# Altium PCB UTAT_data handling_v1_componentMap.PcbDoc (part 3 of 3)
Units mm, origin at the board's own origin, x right, y up, seen from the top; angles counter-clockwise.
Board outline 152.4 x 101.6 mm, 4 copper layers (Top Layer, +3V3, GND, Bottom Layer); 168 components, 207 nets, 753 pads, 464 vias.
Unrouted connection lines stored in the file: 1.
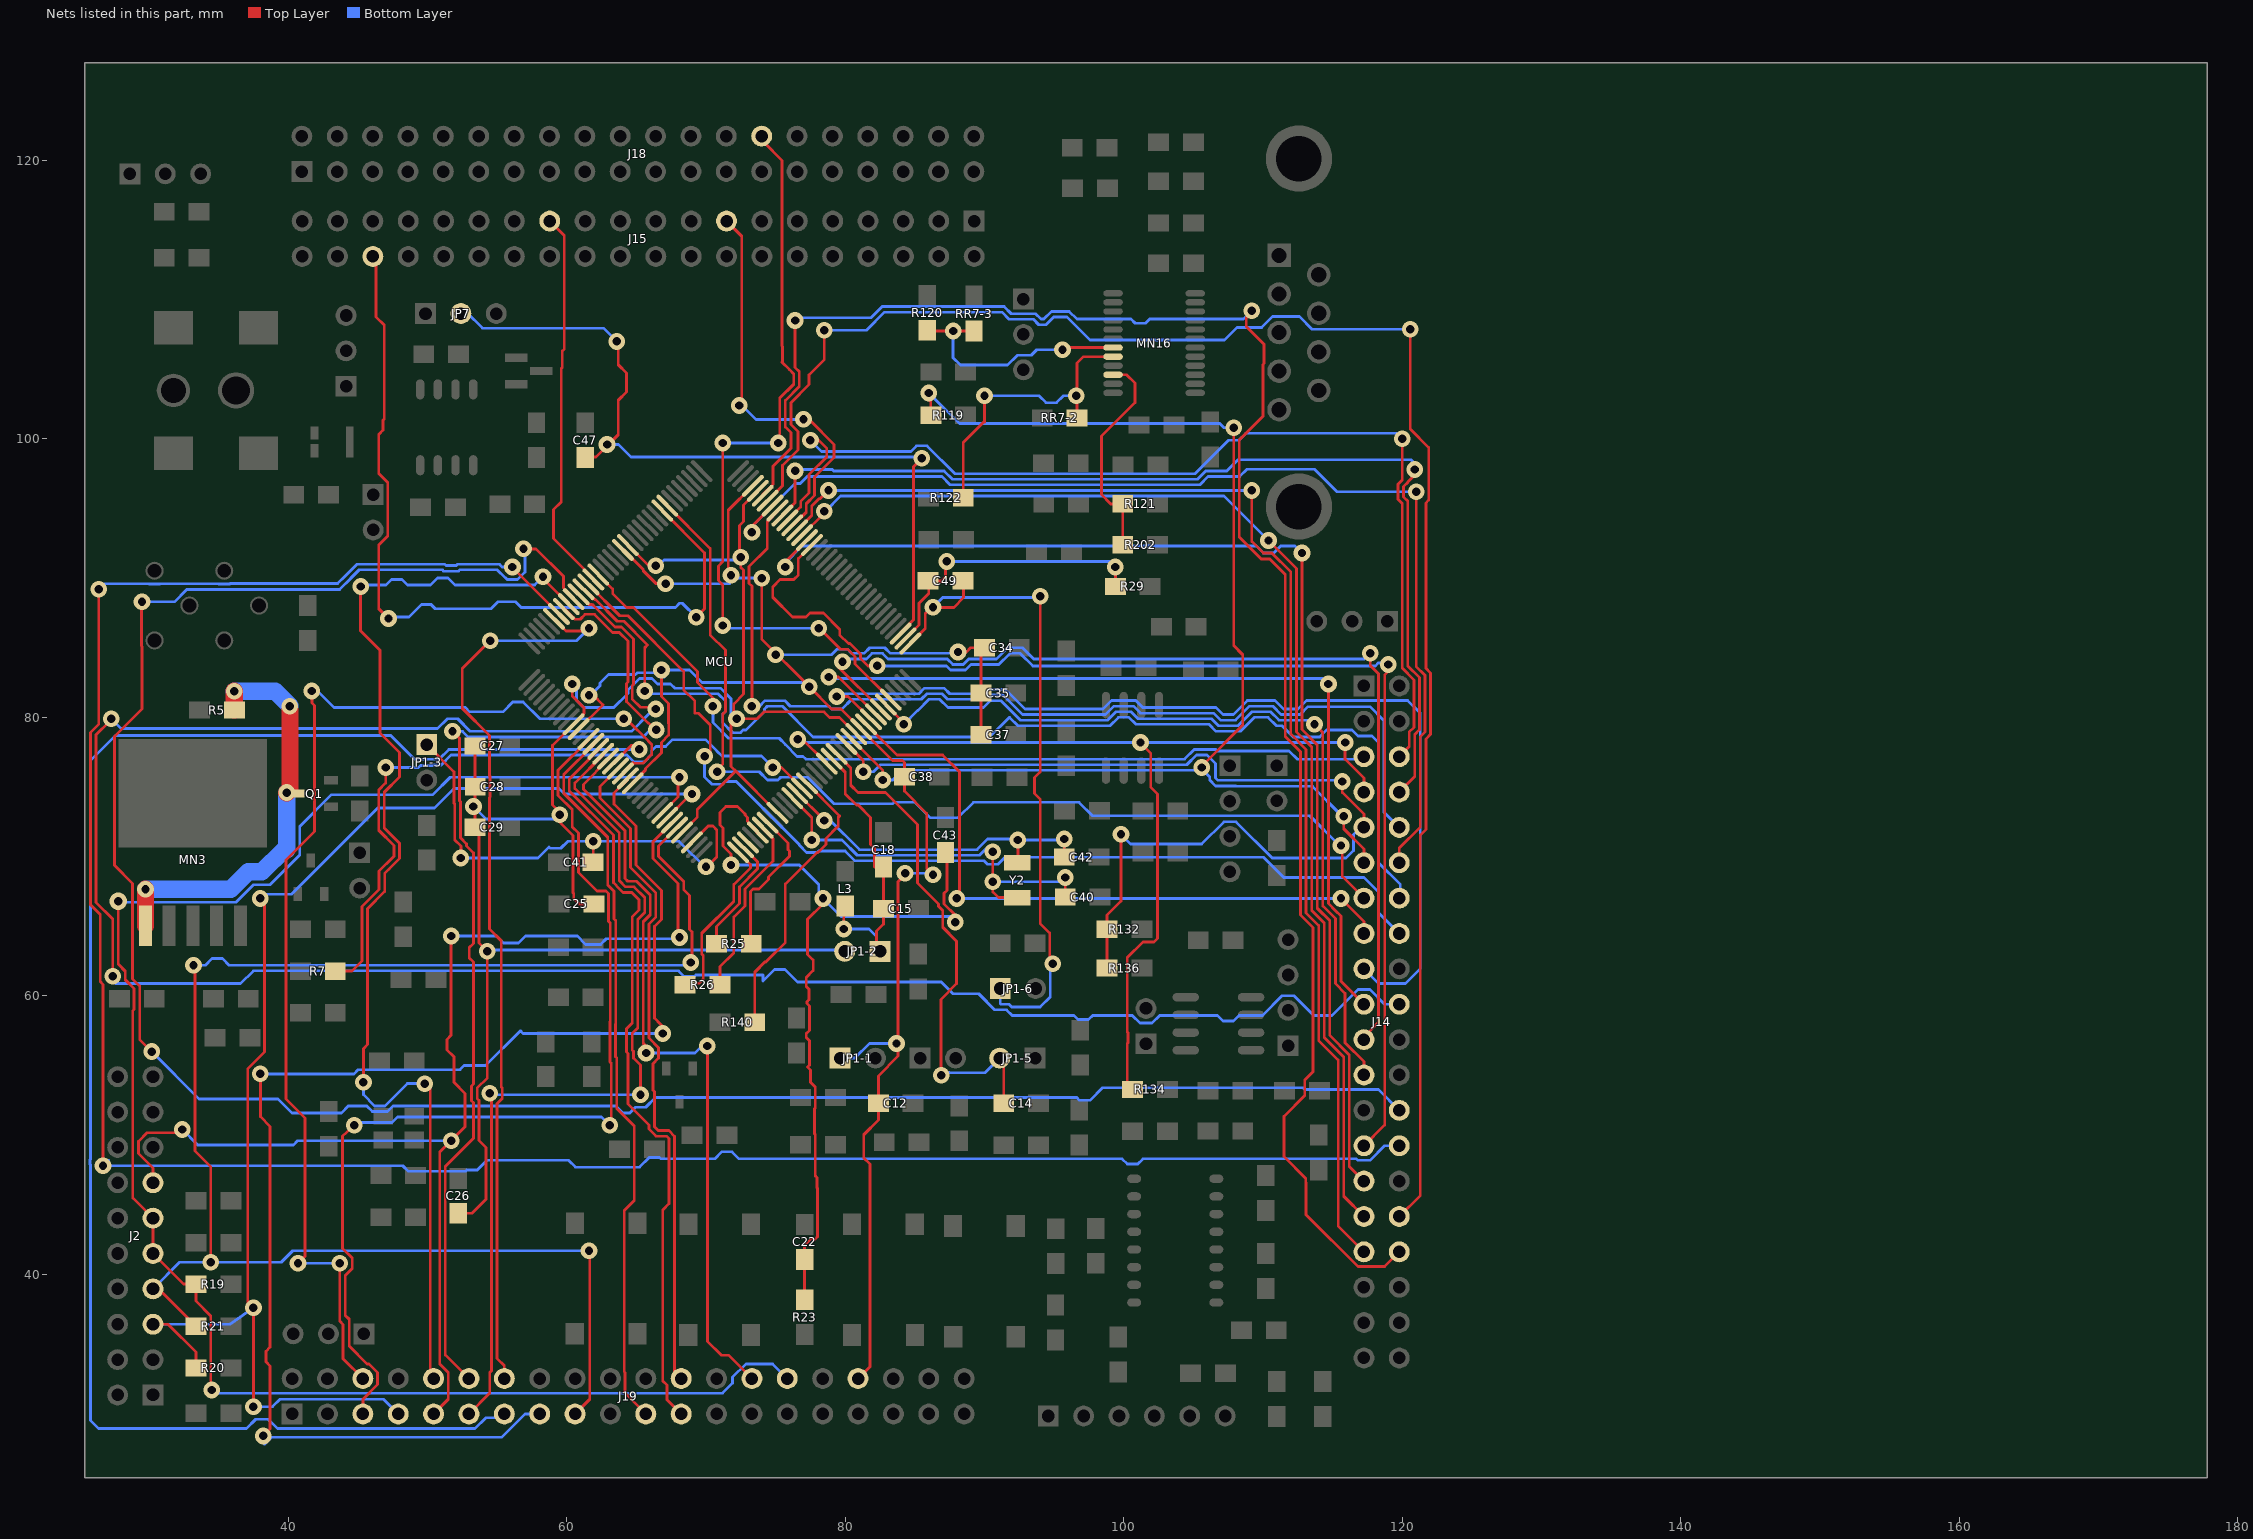
[diagram p5: the nets of this part, all layers, seen from the top]

## Via types
v1: diameter 1.2, hole 0.6, Top Layer to Bottom Layer, 463 vias
v2: diameter 1.27, hole 0.6, Top Layer to Bottom Layer, 1 vias

## Nets (pads, with @x,y where several pads share a name; then routed paths per layer and width w, separated by ;. In a path a pad name is that pad's centre, name@x,y a point inside that pad or via, vN(x,y) a via of type N, cw(c..) or ccw(c..) an arc to the next point about the centre after c; other vN are vias at no path point) (continued)
PB27: J18.28 MCU.68 | length 55.7
  Top Layer w0.2: v1(71.2,86.6) 71.2,89.527 70.9,89.827 70.9,90.873 71.2,91.173 v1(71.2,99.7) ; J18.28@74.151,121.32 75.47,120.001 75.47,106.668 75.5,106.638 75.5,105.562 75.47,105.532 75.47,105.5 75.473,105.5 76,104.973 ; v1(75.2,99.7) 75.3,99.8 75.3,102.927 76.3,103.927 76.3,104.673 76,104.972 ; v1(78.1,86.4) 78.146,86.4 79.646,84.9 80.173,84.9 80.7,84.373 80.7,83.846 MCU.68@83.268,81.278
  Bottom Layer w0.2: v1(71.2,86.6) 71,86.4 v1(78.1,86.4) ; v1(71.2,99.7) 71,99.7 v1(75.2,99.7)
PB28: J2.9 J2.11 J19.30 MCU.28 R19.1 | length 129.3
  Top Layer w0.2: v2(27.8,66.8) 27.8,62.273 28.3,61.773 28.3,61.16 28.931,60.529 28.931,59.031 28.84,58.94 28.84,45.49 J2.11@30.29,44.04 J2.9@30.29,41.5 32.49,39.3 33.361,39.3 R19.1@33.381,39.28 33.381,38.079 34.431,37.029 34.431,31.769 v1(34.5,31.7) ; MCU.28@66.863,73.146 68,74.282 68,75.6 v1(68.1,75.7)
  Bottom Layer w0.2: v2@28.226,66.726 36.253,66.726 37.507,67.98 38.688,67.98 40.825,70.117 40.825,72.175 43.1,74.45 50.385,74.45 51.635,75.7 v1(68.1,75.7) ; v1(34.5,31.7) 34.73,31.47 71.196,31.47 71.915,32.189 71.915,32.619 72.866,33.57 74.791,33.57 J19.30@75.841,32.52
PB29: J2.5 J19.7 MCU.29 R20.1 | length 97.3
  Top Layer w0.2: J2.5@30.29,36.42 31.38,36.42 33.381,34.419 R20.1@33.381,33.28 ; v1@37.1,38 37.1,54.773 38.3,55.973 38.3,66.9 38.2,67 v1(38,67) ; v1(37.5,30.5) v1(37.5,37.6) ; MCU.29@67.217,72.792 68.825,74.4 v1@69.2,74.4
  Bottom Layer w0.2: J2.5@30.29,36.42 35.82,36.42 v1(37.5,37.6) ; v1(37.5,30.5) 38.877,30.5 39.407,31.03 46.851,31.03 J19.7@47.901,29.98 ; v1@38.2,67.3 40.227,67.3 46.427,73.5 50.5,73.5 51.9,74.9 59.438,74.9 59.838,74.5 v1(69,74.5)
PB30: J2.13 J19.9 MCU.30 | length 90.1
  Top Layer w0.2: J2.13@30.29,46.58 30.29,47.635 29.24,48.685 29.24,49.555 29.855,50.17 32.17,50.17 v1(32.4,50.4) ; J19.9@50.441,29.98 51.491,31.03 51.491,32.955 50.884,33.562 50.884,48.784 v1(51.7,49.6) 52.7,50.6 52.7,53 51.9,53.8 51.9,55.627 51.4,56.127 51.4,56.873 51.7,57.173 v1(51.7,64.3) ; MCU.30@67.571,72.439 66.2,71.068 66.2,69.865 68,68.065 68,64.3 v1(68.1,64.2)
  Bottom Layer w0.2: v1(32.4,50.4) 33.5,49.3 40.373,49.3 40.673,49.6 v1(51.7,49.6) ; v1(51.7,64.3) 54.962,64.3 55.462,63.8 56.538,63.8 57.038,64.3 60.762,64.3 61.362,63.7 62.438,63.7 62.838,64.1 68,64.1 v1(68.1,64.2)
PB31: J2.7 J19.17 MCU.31 R21.1 | length 118.1
  Top Layer w0.2: J2.7@30.29,38.96 30.701,38.96 R21.1@33.381,36.28 ; v1(33.2,62.2) 33.3,62.1 33.3,48.866 34.431,47.735 v1(34.431,40.869) ; J19.17@60.601,29.98 61.651,31.03 61.651,41.649 v1(61.6,41.7) ; MCU.31@67.924,72.085 66.6,70.761 66.6,70.031 68.4,68.231 68.4,67.634 68.819,67.215 68.819,64.781 69,64.6 69,62.5 v1(68.9,62.4)
  Bottom Layer w0.2: J2.7@30.29,38.96 32.199,40.869 v1(34.431,40.869) 39.496,40.869 40.327,41.7 v1(61.6,41.7) ; v1(33.2,62.2) 34.053,62.2 34.533,62.68 35.279,62.68 35.759,62.2 68.7,62.2 v1(68.9,62.4)
PC0: J14.5 MCU.130 | length 63.5
  Top Layer w0.2: MCU.130@62.267,90.258 63.3,89.225 63.3,88.896 64.296,87.9 64.801,87.9 69.4,83.301 69.4,82.5 70.5,81.4 v1(70.5,80.8)
  Bottom Layer w0.2: v1(70.5,80.8) 70.5,79.632 71.631,78.5 75.266,78.5 75.7,78.066 75.7,78.045 76.545,77.2 76.973,77.2 77.173,77 104.362,77 105.062,77.7 106.637,77.7 106.757,77.58 110.116,77.58 110.126,77.59 111.874,77.59 112.464,77 117.07,77 J14.5@117.25,77.18 J14.5@116.801,77.629
PC1: J14.7 MCU.55 R134.1 | length 73.6
  Top Layer w0.2: v1(76.6,78.418) 76.6,78.446 76.754,78.6 MCU.55@78.672,76.681 ; R134.1@100.631,53.28 100.25,53.661 100.25,56.577 100.3,56.627 100.3,57.373 100.25,57.423 100.25,62.749 101.376,63.875 102.174,63.875 102.431,64.132 102.431,74.503 101.936,74.998 101.936,77.43 v1@101.1,78.266 ; v1(115.9,78.2) 115.9,77 117.25,75.65 J14.7@117.25,74.64
  Bottom Layer w0.2: v1(76.6,78.418) 76.6,78.3 76.7,78.2 v1(115.9,78.2)
  other v1: 101.2,78.2
PC2: J14.9 MCU.59 R132.1 R136.2 | length 73.8
  Top Layer w0.2: MCU.59@80.086,78.096 81.3,76.882 v1(81.3,76.1) ; R136.2@98.8,62 R132.1@98.8,64.8 98.8,65.801 99.8,66.801 v1(99.8,71.6) ; v1(115.7,75.4) 115.7,74.6 117.25,73.05 J14.9@117.25,72.1
  Bottom Layer w0.2: v1(81.3,76.1) 82.027,76.1 82.527,76.6 104.527,76.6 105.227,77.3 105.973,77.3 106.581,76.692 106.581,75.656 106.757,75.48 115.62,75.48 v1(115.7,75.4) ; v1(99.8,71.6) 100.5,70.9 105.596,70.9 107.196,72.5 108.066,72.5 110.666,69.9 115.973,69.9 116.5,70.427 116.5,71.6 117,72.1 J14.9@117.25,72.1
PC3: J14.11 MCU.60 R119.1 | length 92.7
  Top Layer w0.2: MCU.60@80.511,78.449 MCU.60@80.44,78.449 82.7,76.189 v1(82.7,75.5) ; v1(86,103.3) 86,102.8 86.15,102.65 R119.1@86.15,101.7 ; v1@105.8,76.7 108.55,79.45 108.55,84.499 107.9,85.149 v1(107.9,100.8) ; v1(115.8,72.9) 115.8,72 117.25,70.55 J14.11@117.25,69.56
  Bottom Layer w0.2: v1(82.7,75.5) 83.407,75.5 84.107,76.2 105.7,76.2 106.181,75.719 106.181,75.49 106.591,75.08 108.046,75.08 108.076,75.05 113.549,75.05 v1@115.659,72.94 ; v1(86,103.3) 88.2,101.1 106.893,101.1 107.193,100.8 v1(107.9,100.8)
  other v1: 105.6,76.4
PC4: J14.13 MCU.116 | length 73.9
  Top Layer w0.2: MCU.116@67.217,95.208 70.3,92.125 70.3,85.927 71.4,84.827 71.4,80.427 71.2,80.227 71.2,76.627 70.6,76.027 v1@70.6,76 ; v1(115.6,70.8) 115.7,70.7 115.7,68.57 J14.13@117.25,67.02
  Bottom Layer w0.2: v1(70.8,76.1) 73.827,76.1 74.427,75.5 75.173,75.5 75.373,75.7 77.3,75.7 79.2,73.8 83.404,73.8 83.504,73.9 85,73.9 86.1,72.8 88.1,72.8 89.2,73.9 96.793,73.9 97.753,72.94 113.36,72.94 115.5,70.8 v1(115.6,70.8)
PC5: J14.15 MCU.63 | length 48.1
  Top Layer w0.2: MCU.63@81.501,79.51 83.71,77.3 86.999,77.3 88.2,76.099 88.2,67.2 v1(88,67) ; v1(115.6,67) 117.25,65.35 J14.15@117.25,64.48
  Bottom Layer w0.2: v1(88,67) v1(115.6,67)
PC6: J14.17 MCU.64 | length 71.4
  Top Layer w0.2: v1(79.4,81.5) 80.2,81.5 80.209,81.509 MCU.64@81.854,79.863
  Bottom Layer w0.2: v1(79.4,81.5) 79.6,81.7 85.296,81.7 85.696,82.1 87.104,82.1 87.504,81.7 89.796,81.7 90.096,82 91.504,82 92.904,80.6 98.522,80.6 99.126,81.204 100.866,81.204 101.366,80.704 106.623,80.704 107.127,80.2 107.873,80.2 108.877,81.204 110.87,81.204 111.474,80.6 112.511,80.6 113.121,81.21 120.39,81.21 121.3,80.3 121.3,61.965 120.225,60.89 118.3,60.89 J14.17@117.25,61.94
PC7: J14.19 MCU.65 | length 64.8
  Top Layer w0.2: v1(78.827,82.9) 79.524,82.9 ; 79.525,82.9 MCU.65@82.208,80.217 ; 114.7,71.173 114.7,66.627 115.227,66.1 ; 114.7,71.173 v1(114.7,82.4) ; 115.228,66.1 115.6,65.728 115.6,61.05 J14.19@117.25,59.4
  Bottom Layer w0.2: v1(78.827,82.9) 78.927,82.8 114.3,82.8 114.6,82.5 v1@114.9,82.5
PC8: J14.21 MCU.66 | length 72.3
  Top Layer w0.2: v1@79.466,83.666 MCU.66@82.561,80.571 ; J14.21@117.25,56.86 117.25,57.06 118.3,58.11 118.3,83.134 117.7,83.734 v1(117.7,84.6)
  Bottom Layer w0.2: v1(79.8,84) 80,84.2 81.527,84.2 81.927,84.6 82.673,84.6 83.073,84.2 87.327,84.2 87.727,83.8 88.473,83.8 88.873,84.2 90.862,84.2 91.662,85 92.738,85 93.538,84.2 117.3,84.2 v1(117.7,84.6)
PC9: J14.23 MCU.67 | length 61.3
  Top Layer w0.2: MCU.67@82.915,80.924 v1@84.269,79.569 ; v1(113.7,79.5) 114.3,78.9 114.3,71.339 114.3,66.462 115.062,65.7 ; 115.063,65.7 115.2,65.563 115.2,60.884 115.9,60.184 115.9,56.631 117.25,55.281 J14.23@117.25,54.32
  Bottom Layer w0.2: v1(84.2,79.5) 85.2,80.5 85.227,80.5 86.027,81.3 86.773,81.3 87.373,80.7 89.927,80.7 90.427,81.2 91.173,81.2 92.573,79.8 98.854,79.8 99.458,80.404 100.534,80.404 101.034,79.904 106.292,79.904 106.796,79.4 108.204,79.4 109.208,80.404 110.538,80.404 111.142,79.8 113.4,79.8 v1(113.7,79.5)
PC10: J15.36 MCU.117 | length 59.9
  Top Layer w0.2: J15.36@46.08,113.1 46.08,113.024 46.463,112.64 46.3,112.477 46.3,108.767 46.9,108.167 46.9,101.434 46.8,101.334 46.8,100.627 46.5,100.327 46.5,97.524 47.15,96.874 47.15,93.025 46.5,92.375 46.5,87.8 v1(47.2,87.1) ; MCU.117@66.863,94.854 69.9,91.818 69.9,87.8 v1(69.3,87.2)
  Bottom Layer w0.2: v1@47.5,87.2 48.673,87.2 49.573,88.1 50.217,88.1 50.239,88.122 50.562,87.8 54.562,87.8 55.063,88.301 55.064,88.3 56.339,88.3 56.739,87.9 65.704,87.9 ; 65.704,87.9 67.804,87.9 68.104,88.2 68.3,88.2 v1(69.3,87.2)
PC11: J14.27 MCU.93 | length 88.7
  Top Layer w0.2: MCU.93@77.611,92.379 76.632,91.4 76.632,90.232 76.3,89.9 75.327,89.9 74.8,89.373 74.8,88.627 76.227,87.2 77.173,87.2 77.473,87.5 78.427,87.5 79.6,86.327 79.6,85.927 80.227,85.3 80.338,85.3 81.1,84.538 81.1,84.227 81.627,83.7 v1(82.3,83.7) ; J14.27@117.25,49.24 118.74,50.73 118.74,83.04 119.1,83.4 119,83.5 v1(119,83.8)
  Bottom Layer w0.2: v1(82.3,83.7) 87.262,83.7 87.562,83.4 88.638,83.4 89.038,83.8 91.027,83.8 91.827,84.6 92.573,84.6 93.473,83.7 118.073,83.7 118.273,83.9 118.6,83.9 v1@118.8,83.7
PC12: J14.29 MCU.94 | length 88
  Top Layer w0.2: v1(75.7,90.8) 75.7,91.175 MCU.94@77.258,92.733 ; v1@112.8,92.1 v1(112.8,91.8) 112.8,79.127 113.9,78.027 113.9,71.504 ; 113.9,71.504 113.9,66.296 114.8,65.396 114.8,57.166 116.2,55.766 116.2,47.75 J14.29@117.25,46.7
  Bottom Layer w0.2: v1@75.7,91.1 76.9,92.3 109.527,92.3 110.027,91.8 110.773,91.8 111.273,92.3 112.3,92.3 v1(112.8,91.8)
PC13: J14.31 MCU.95 | length 87.4
  Top Layer w0.2: MCU.95@76.904,93.086 78.5,94.682 v1(78.5,94.8) ; v1(110.4,92.7) 112.4,90.7 112.4,78.962 113.5,77.862 113.5,71.67 113.5,66.13 114.4,65.23 114.4,57 115.8,55.6 115.8,45.61 J14.31@117.25,44.16
  Bottom Layer w0.2: v1(78.5,94.8) 78.573,94.8 79.673,95.9 107.2,95.9 v1(110.4,92.7)
PC14: J14.33 MCU.96 | length 92.6
  Top Layer w0.2: MCU.96@76.551,93.44 77.6,94.489 77.6,95.173 78.127,95.7 78.2,95.7 v1(78.8,96.3) ; v1(109.2,96.3) 109.2,92.627 110.027,91.8 110.634,91.8 112,90.434 112,78.796 113.1,77.696 113.1,71.836 113.1,65.965 114,65.064 114,56.8 115.4,55.4 115.4,43.47 J14.33@117.25,41.62
  Bottom Layer w0.2: v1(78.8,96.3) v1(109.2,96.3)
PC15: J15.15 MCU.97 | length 28.6
  Top Layer w0.2: J15.15@71.48,115.64 72.57,114.55 72.57,102.57 v1(72.4,102.4) ; MCU.97@76.197,93.793 76.259,93.793 77.2,94.734 77.2,95.338 77.8,95.938 77.8,97.273 79.2,98.673 79.2,99.6 77.5,101.3 v1@77.2,101.3
  Bottom Layer w0.2: v1(72.4,102.4) 72.6,102.4 73.6,101.4 v1(77,101.4)
PC16: J14.6 MCU.98 | length 76.8
  Top Layer w0.2: MCU.98@75.844,94.218 MCU.98@75.844,94.147 76.8,95.103 76.8,95.504 77.4,96.104 77.4,97.438 78.681,98.719 78.681,99.319 v1@77.7,100.3 ; J14.6@119.79,77.18 120.5,77.89 120.5,78.945 120.84,79.285 120.84,82.695 120,83.535 120,95.362 119.7,95.662 119.7,96.738 120,97.038 120,97.066 v1(120,100)
  Bottom Layer w0.2: v1(77.5,99.9) 78.3,99.1 84.727,99.1 85.127,99.5 85.873,99.5 87.873,97.5 105.127,97.5 107.527,99.9 108.273,99.9 108.773,100.4 119.6,100.4 v1(120,100)
PC17: J14.8 MCU.99 | length 74.1
  Top Layer w0.2: MCU.99@75.49,94.501 76.4,95.41 v1(76.4,97.7) ; J14.8@119.79,74.64 120.9,75.75 120.9,78.779 121.24,79.119 121.24,82.861 120.4,83.701 120.4,95.527 120.1,95.827 120.1,96.573 120.4,96.873 120.4,96.9 120.9,97.4 v1(120.9,97.8)
  Bottom Layer w0.2: v1(76.4,97.7) 76.5,97.8 79.073,97.8 79.173,97.7 87.107,97.7 87.707,97.1 105.293,97.1 105.893,97.7 107.4,97.7 108.2,98.5 120.64,98.5 120.9,98.24 v1(120.9,97.8)
PC18: J14.10 MCU.100 | length 72.2
  Top Layer w0.2: v1(73.3,80.8) 73.3,89.427 73.1,89.627 73.1,90.373 73.1,90.827 74.404,92.131 74.404,94.051 75.137,94.783 MCU.100@75.137,94.854
  Bottom Layer w0.2: v1(73.3,80.8) 73.834,80.8 74.234,81.2 75.656,81.2 76.056,80.8 78.827,80.8 79.027,80.6 79.773,80.6 80.473,81.3 85.462,81.3 85.862,81.7 86.938,81.7 87.338,81.3 89.962,81.3 90.262,81.6 91.338,81.6 92.738,80.2 98.688,80.2 99.292,80.804 100.7,80.804 101.2,80.304 106.458,80.304 106.962,79.8 108.038,79.8 109.042,80.804 110.704,80.804 111.308,80.2 112.677,80.2 113.247,80.77 117.685,80.77 118.7,79.755 118.7,73.19 J14.10@119.79,72.1
PC19: J14.12 MCU.101 | length 80.8
  Top Layer w0.2: v1(73.3,93.3) 73.3,93.725 MCU.101@74.783,95.208 ; J14.12@119.79,69.56 119.79,70.615 121.3,72.125 121.3,78.614 121.64,78.954 121.64,83.026 121,83.666 v1(121,96.2)
  Bottom Layer w0.2: v1@73.3,93.7 76.4,96.8 76.773,96.8 77.273,97.3 86.941,97.3 87.541,96.7 105.459,96.7 106.059,97.3 108.327,97.3 108.847,97.82 113.69,97.82 115.31,96.2 v1(121,96.2)
PC20: J15.25 MCU.131 | length 27.8
  Top Layer w0.2: J15.25@58.78,115.64 59.83,114.59 59.83,106.468 59.681,106.319 59.681,105.139 59.606,105.064 59.606,95.479 59.05,94.923 59.05,92.839 61.914,89.975 MCU.131@61.914,89.904 MCU.131@61.914,89.834
PC21: J14.16 MCU.132 | length 73.9
  Top Layer w0.2: MCU.132@61.56,89.551 63.811,87.3 64.4,87.3 68.4,83.3 68.4,81.972 69.2,81.173 69.2,80.3 69.473,80.3 70.3,79.472 v1@70.3,77.408
  Bottom Layer w0.2: v1(69.9,77.2) 69.9,75.727 70.427,75.2 71.18,75.2 71.38,75.4 72.175,75.4 76.7,70.876 76.7,70.827 77.227,70.3 77.973,70.3 78.073,70.4 79.996,70.4 80.696,69.7 89.986,69.7 90.229,69.456 90.975,69.456 91.478,69.96 110.04,69.96 111.49,68.51 117.245,68.51 118.3,67.455 118.3,65.97 J14.16@119.79,64.48
PC22: J14.14 MCU.133 | length 81.5
  Top Layer w0.2: MCU.133@61.207,89.197 61.277,89.197 62.01,88.464 62.067,88.464 63.631,86.9 64.104,86.9 65.8,85.204 65.6,85.004 v1(65.6,81.9)
  Bottom Layer w0.2: v1(65.6,81.9) 65.8,81.7 70.873,81.7 71.4,81.173 71.4,80.427 71.2,80.227 71.2,79.627 71.927,78.9 72.473,78.9 72.673,79.1 72.873,79.1 74.2,80.427 74.2,80.6 74.4,80.8 75.491,80.8 77.691,78.6 90.373,78.6 91.777,80.004 91.803,80.004 92.407,79.4 99.019,79.4 99.623,80.004 100.369,80.004 100.869,79.504 106.126,79.504 106.63,79 108.37,79 109.374,80.004 110.373,80.004 110.977,79.4 111.373,79.4 112.173,78.6 114.073,78.6 114.573,79.1 116.385,79.1 116.815,78.67 117.83,78.67 118.3,78.2 118.3,69.565 119.865,68 119.865,67.095 J14.14@119.79,67.02
PC23: J14.20 MCU.134 | length 169.9
  Top Layer w0.2: v1@27.122,79.678 26.2,78.756 26.2,66.708 27.4,65.508 v1(27.4,61.4) ; MCU.134@60.853,88.844 61.586,88.111 61.798,88.111 61.844,88.064 61.901,88.064 63.466,86.5 63.938,86.5 64.8,85.638 64.8,82.373 64.7,82.273 64.7,81.327 65.3,80.727 66.173,80.727 66.173,80.527 66.246,80.6 v1(66.4,80.6)
  Bottom Layer w0.2: v1@27.2,61.3 27.62,60.88 36.58,60.88 37.5,61.8 68.027,61.8 68.427,61.4 69.173,61.4 69.273,61.5 74.1,61.5 74.1,61.073 74.927,61.9 75.673,61.9 76.573,61 86.894,61 87.744,60.15 89.587,60.15 90.737,59 91.593,59 91.993,58.6 96.427,58.6 96.727,58.3 97.473,58.3 97.773,58.6 100.615,58.6 101.165,58.05 102.035,58.05 102.585,58.6 106.727,58.6 107.127,58.2 107.873,58.2 108.273,58.6 109.955,58.6 111.365,60.01 112.235,60.01 113.645,58.6 114.965,58.6 116.815,60.45 117.685,60.45 118.735,59.4 J14.20@119.79,59.4 ; v1(27.3,79.9) 28,79.2 50.727,79.2 51.427,79.9 52.173,79.9 53.073,79 64.661,79 65.894,80.233
PC24: J14.26 MCU.135 | length 164.4
  Top Layer w0.2: v1(29.5,88.3) 29.456,88.256 29.456,85.136 29.5,85.092 29.5,80.6 27.522,78.622 27.522,69.378 28.827,68.073 28.827,61.204 29.331,60.7 29.331,56.869 v1(30.2,56) ; v1(56.9,92.1) 57.8,92.1 59.767,90.133 59.767,89.294 60.499,88.561 MCU.135@60.499,88.49
  Bottom Layer w0.2: v1(29.5,88.3) 31.832,88.3 32.712,89.18 43.694,89.18 44.495,89.981 44.495,89.995 45.1,90.6 51.061,90.6 51.161,90.5 52.238,90.5 52.339,90.6 55,90.6 55.6,90 55.627,90 55.727,89.9 56.473,89.9 57,90.427 57,92 v1(56.9,92.1) ; v1(30.2,56) 33.6,52.6 39.273,52.6 40.273,51.6 43.814,51.6 44.314,52.1 45.641,52.1 46.041,51.7 47.118,51.7 47.518,52.1 63.538,52.1 64.038,51.6 64.527,51.6 64.927,52 65.673,52 66.373,52.7 66.727,52.7 67.473,52.7 96.627,52.7 96.827,52.5 97.573,52.5 98.473,53.4 112.866,53.4 112.996,53.27 118.3,53.27 J14.26@119.79,51.78
PC25: J19.10 MCU.136 | length 83.3
  Top Layer w0.2: v1(45.2,89.4) 45.2,86.224 46.6,84.824 46.6,78.873 48,77.473 48,75.727 46.9,74.627 46.9,72.061 48,70.961 48,69.861 47.238,69.1 47.225,69.1 46.925,68.8 46.925,67.483 45.7,66.258 45.7,56.501 45.4,56.201 v1(45.4,53.8) ; v1(49.8,53.7) 49.875,53.7 50.2,53.375 50.2,32.52 J19.10@50.441,32.52 ; v1@58.2,89.8 58.3,89.7 58.582,89.7 MCU.136@60.146,88.137
  Bottom Layer w0.2: v1@45.3,89.5 47.027,89.5 47.427,89.9 48.173,89.9 48.572,89.5 50.227,89.5 50.727,90 51.473,90 51.973,89.5 54.564,89.5 54.566,89.501 55.56,89.501 55.561,89.5 57.7,89.5 v1(58.3,90.1) ; v1(45.4,53.8) 45.4,52.907 46.207,52.1 46.953,52.1 48.553,53.7 v1(49.8,53.7)
PC26: J19.12 MCU.137 | length 78
  Top Layer w0.2: v1(51.8,79) 52.3,78.5 52.3,73.999 52.363,73.936 52.363,71.356 52.8,70.919 52.8,70.773 53.3,70.273 53.3,63.773 53,63.473 53,62.727 53.3,62.427 53.3,53.667 53.171,53.538 53.171,52.462 53.3,52.333 53.3,49.778 51.284,47.762 51.284,34.217 J19.12@52.981,32.52 ; MCU.137@59.792,87.783 59.863,87.783 60.596,87.05 60.969,87.05 61.319,87.4 62,87.4 63.3,86.1 63.773,86.1 64.4,85.473 64.4,82.538 64.3,82.438 64.3,81.127 65.827,79.6 65.861,79.6 66.661,78.8 66.423,79.038 v1(66.423,79.1)
  Bottom Layer w0.2: v1(51.8,79) 52.507,79 52.907,78.6 64.827,78.6 65.493,78.6 65.993,79.1 v1(66.423,79.1)
PC27: J14.28 MCU.138 | length 175.3
  Top Layer w0.2: v1@26.2,89.4 v1(26.4,89.2) 26.4,79.522 25.8,78.922 25.8,66.542 26.5,65.842 26.5,61.027 26.7,60.827 v1(26.7,47.8) ; v1(56.1,90.8) 56.1,90.768 MCU.138@59.439,87.429
  Bottom Layer w0.2: v1@26.34,47.9 v1@26.7,47.9 ; v1(26.4,89.2) 26.8,89.6 29.993,89.6 30.013,89.58 30.8,89.58 30.82,89.6 34.993,89.6 35.013,89.58 35.8,89.58 35.825,89.605 43.553,89.605 44.095,90.147 44.095,90.161 44.934,91 51.227,91 51.327,90.9 52.073,90.9 52.173,91 55.166,91 55.366,90.8 56.5,90.8 56.1,90.4 v1(56.1,90.8) ; v1@27.1,48.2 v1(26.7,47.8) 48.227,47.8 48.627,47.4 52.727,47.4 52.827,47.5 53.573,47.5 54.273,48.2 60.127,48.2 60.627,47.7 65.227,47.7 65.927,48.4 66.673,48.4 66.773,48.3 70.627,48.3 71.127,48.8 71.873,48.8 72.373,48.3 99.889,48.3 100.258,47.931 101.004,47.931 101.373,48.3 116.705,48.3 116.815,48.19 117.685,48.19 118.735,49.24 J14.28@119.79,49.24
PC28: J19.14 MCU.139 | length 65.2
  Top Layer w0.2: v1(54.5,85.5) 52.5,83.5 52.5,80.659 54.463,78.696 54.463,75.795 54.483,75.775 54.483,74.277 54.463,74.257 54.463,64.799 55.3,63.962 55.3,53.444 55.371,53.373 55.371,52.627 55,52.256 55,33.96 55.521,33.439 J19.14@55.521,32.52 ; MCU.139@59.085,87.076 59.961,86.2 61.4,86.2 v1(61.6,86.4)
  Bottom Layer w0.2: v1@55.1,85.5 60.7,85.5 v1(61.6,86.4)
PC29: J14.32 MCU.102 | length 124.5
  Top Layer w0.2: MCU.102@74.429,95.561 75.5,96.632 75.5,98.1 76.6,99.2 76.6,99.527 76.6,100.273 76.6,100.527 76.1,101.027 76.1,102.596 77.4,103.896 77.4,104.6 78.5,105.7 v1@78.5,107.6 ; J14.32@119.79,44.16 121.3,45.67 121.3,71.559 121.7,71.959 121.7,78.448 122.04,78.788 122.04,83.192 121.7,83.532 121.7,95.4 121.9,95.6 121.9,99.373 120.575,100.698 v1(120.575,107.875)
  Bottom Layer w0.2: v1(78.5,107.8) 81.527,107.8 82.827,109.1 91.25,109.1 91.76,108.59 93.509,108.59 93.899,108.2 94.419,108.2 94.974,108.755 95.918,108.755 97.573,107.1 107.227,107.1 108.127,108 109.906,108 110.686,108.78 112.621,108.78 113.526,107.875 v1(120.575,107.875)
PC30: J14.34 MCU.103 | length 127.8
  Top Layer w0.2: MCU.103@74.076,95.915 74.076,95.985 74.809,96.718 74.809,98.036 76.1,99.327 76.1,100.461 75.7,100.861 75.7,102.761 76.7,103.761 76.7,104.838 76.4,105.138 v1(76.4,108.5) ; v1(109.2,109.2) 109.2,109.1 108.8,108.7 108.8,108.073 110.08,106.793 110.08,105.427 110,105.347 110,101.627 108.3,99.927 108.3,92.962 109.877,91.384 110.484,91.384 111.6,90.269 111.6,78.63 112.7,77.53 112.7,72.001 112.7,65.799 113.6,64.899 113.6,54.549 113,53.949 113,52.851 111.5,51.351 111.5,48.46 113.075,46.885 113.075,46.626 113.1,46.601 113.1,44.285 116.815,40.57 118.74,40.57 J14.34@119.79,41.62
  Bottom Layer w0.2: v1(76.4,108.5) 76.6,108.7 77.973,108.7 81.862,108.7 82.662,109.5 91.416,109.5 91.926,108.99 93.674,108.99 94.064,108.6 94.254,108.6 94.809,109.155 96.083,109.155 96.638,108.6 100.527,108.6 100.827,108.3 101.573,108.3 101.873,108.6 108.6,108.6 v1(109.2,109.2)
PD0: J19.5 MCU.13 | length 72.6
  Top Layer w0.2: v1(44.752,50.7) 43.9,49.948 43.9,41.873 44.6,41.173 44.6,40.427 44.1,39.927 44.1,37.061 44.381,36.78 44.381,34.856 45.667,33.57 45.796,33.57 46.411,32.955 46.411,32.085 45.361,31.035 J19.5@45.361,29.98 ; MCU.13@61.56,78.449 61.56,78.378 59.383,76.201 59.383,74.39 60.4,73.373 60.4,72.139 60.85,71.688 60.85,68.851 62.176,67.525 62.824,67.525 63,67.349 63,65.361 63.125,65.236 63.125,58.161 63.1,58.135 63.1,55.265 63.2,55.165 63.2,50.8 v1(63.1,50.7)
  Bottom Layer w0.2: v1(44.752,50.7) 44.952,50.9 47.45,50.9 47.85,51.3 62.5,51.3 v1(63.1,50.7)
PD1: J19.21 MCU.14 | length 52.1
  Top Layer w0.2: MCU.14@61.914,78.096 61.914,78.025 59.783,75.894 59.783,74.555 62.95,71.388 62.95,68.851 62.95,67.965 63.4,67.515 63.4,65.527 63.525,65.402 63.525,57.995 63.5,57.97 63.5,55.63 63.6,55.53 63.6,51.896 64.85,50.646 64.85,45.298 64.131,44.579 64.131,33.015 64.191,32.955 64.191,31.47 J19.21@65.681,29.98
PD2: J19.23 MCU.15 | length 53.9
  Top Layer w0.2: MCU.15@62.267,77.742 62.267,77.671 60.183,75.587 60.183,74.721 63.35,71.554 63.35,68.131 63.8,67.681 63.8,67.673 64.04,67.432 64.673,67.432 65.2,66.905 65.2,66.16 64.7,65.66 64.7,58.038 64.3,57.638 64.3,55.961 64.4,55.861 64.4,52.227 65.9,50.727 65.9,50.434 66.409,49.925 67.174,49.925 67.35,49.749 67.35,45.077 66.9,44.627 66.9,32.356 67.2,32.056 67.2,31.001 J19.23@68.221,29.98
PD3: J19.11 MCU.16 | length 63
  Top Layer w0.2: J19.11@52.981,29.98 54.471,31.47 54.471,32.955 54.6,33.084 54.6,52.871 v1(54.471,53) ; MCU.16@62.621,77.389 62.621,77.318 60.583,75.28 60.583,74.887 63.777,71.693 63.777,68.269 64.214,67.832 64.838,67.832 65.6,67.071 65.6,65.994 65.1,65.494 65.1,57.7 64.7,57.3 64.7,56.127 64.8,56.027 64.8,55.527 65.3,55.027 v1(65.3,52.9)
  Bottom Layer w0.2: v1(54.471,53) 54.571,52.9 v1(65.3,52.9)
PD4: J19.28 MCU.17 | length 54.5
  Top Layer w0.2: MCU.17@62.974,77.035 62.974,76.964 61.2,75.19 61.2,74.835 64.177,71.858 64.177,68.435 64.38,68.232 65.004,68.232 66,67.236 66,65.828 65.5,65.328 65.5,56.6 65.7,56.4 v1(65.7,55.9) ; v1@70.1,56.1 70.1,50.699 70.109,50.69 70.109,35.191 71.1,34.2 71.621,34.2 J19.28@73.301,32.52
  Bottom Layer w0.2: v1(65.7,55.9) 69.2,55.9 69.9,56.6 v1(70.1,56.4)
PD5: J19.13 MCU.18 | length 121.9
  Top Layer w0.2: MCU.18@63.328,76.681 64.646,78 v1@65.2,78
  Bottom Layer w0.2: J19.13@55.521,29.98 55.241,29.7 54.186,29.7 53.416,28.93 39.231,28.93 38.561,29.6 37.67,29.6 37,28.93 26.37,28.93 25.8,29.5 25.8,47.427 25.8,47.874 25.77,47.904 25.77,48.236 25.8,48.266 25.8,76.9 27.6,78.7 47.366,78.7 49.076,76.99 50.824,76.99 51.534,77.7 v1(65.2,77.7)
PD6: J19.24 MCU.19 | length 47.9
  Top Layer w0.2: MCU.19@63.681,76.328 62.4,75.046 62.4,74.201 64.577,72.024 64.577,69.225 66.4,67.402 66.4,65.662 65.9,65.162 65.9,56.973 66.6,56.273 66.6,55.527 66.2,55.127 66.2,53.227 66.3,53.127 66.3,50.6 66.575,50.325 67.34,50.325 67.75,49.915 67.75,32.991 J19.24@68.221,32.52
PD7: J19.6 MCU.20 | length 85.3
  Top Layer w0.2: v1(40.7,40.8) 41.2,41.3 41.2,51.238 39.831,52.607 39.831,69.758 41.881,71.808 41.881,80.857 41.7,81.038 v1(41.7,81.9) ; v1(43.7,40.8) 43.7,36.647 43.941,36.406 43.941,33.94 J19.6@45.361,32.52 ; MCU.20@64.035,75.974 64.106,75.974 64.106,76.116 64.758,76.768 64.829,76.698 64.839,76.707 65.48,76.707 66.1,77.327 66.1,78.073 65.573,78.6 64.7,79.473 64.273,79.9 v1(64.1,79.9)
  Bottom Layer w0.2: v1(40.7,40.8) v1(43.7,40.8) ; v1@42,81.8 42.2,81.8 43.3,80.7 52.727,80.7 53.027,80.4 55.427,80.4 56.127,81.1 56.873,81.1 58.073,79.9 64.5,79.9 v1(64.1,79.9)
PD8: J19.15 MCU.21 | length 98.5
  Top Layer w0.2: v1(38,54.4) 38,51.327 38.7,50.627 38.7,34.773 38.401,34.474 38.401,33.728 38.7,33.429 38.7,28.9 v1(38.2,28.4) ; MCU.21@64.389,75.621 64.389,75.55 63.4,74.562 63.4,73.767 64.977,72.19 64.977,69.391 66.8,67.568 66.8,65.497 66.3,64.997 66.3,58.4 66.7,58 67.145,57.555 66.891,57.3 v1(66.9,57.3)
  Bottom Layer w0.2: v1(38,54.4) 44.727,54.4 45.027,54.7 52.334,54.7 52.634,55 54.173,55 56.673,57.5 56.873,57.3 v1(66.9,57.3) ; 38.3,27.8 38.8,28.3 55.326,28.3 57.006,29.98 J19.15@58.061,29.98
PD9: C12.1 C34.1 C35.1 C37.1 C38.1 J19.34 JP1-1.1 MCU.11 MCU.22 MCU.62 MCU.105 MCU.125 | length 141.2
  Top Layer w0.2: MCU.11@60.853,79.156 62.6,80.903 61.903,81.6 v1(61.6,81.6) ; MCU.125@64.035,92.026 64.106,92.026 65.5,90.632 65.5,90.527 66.427,89.6 v1(67.1,89.6) ; MCU.22@64.742,75.267 64.742,75.304 65.638,76.2 65.665,76.227 65.665,76.327 66.8,77.462 66.8,78.204 67.323,78.727 67.323,79.55 67.3,79.573 67.3,81 66.8,81.5 v1(66.8,83.4) ; v1@71.6,90.7 71.6,94.873 73.349,96.622 MCU.105@73.369,96.622 ; v1(74,90) 74,85.627 v1(77.427,82.2) 79.027,80.6 79.703,80.6 MCU.62@81.147,79.156 83.403,76.9 84.1,76.9 84.25,76.75 C38.1@84.25,75.75 84.25,74.7 85.85,73.1 85.85,69.15 v1(86.3,68.7) ; J19.34@80.921,32.52 81.771,33.37 81.771,47.915 81.331,48.355 81.331,50.029 82.381,51.079 C12.1@82.381,52.28 82.381,54.255 83.8,55.674 83.8,68.2 v1@84.2,68.6 ; v1(88.1,84.7) 88.7,84.7 89,85 89.75,85 C35.1@89.75,81.75 C37.1@89.75,78.75
  Bottom Layer w0.2: v1(61.6,81.6) 61.729,81.6 62.4,82.271 62.4,82.473 63.007,83.08 64.941,83.08 65.061,83.2 66.7,83.2 v1@67,82.9 ; v1(66.8,83.4) 68.827,83.4 69.727,82.5 77.127,82.5 v1(77.427,82.2) ; v1(67.1,89.6) 71.7,89.6 ; v1@72.1,90 v1(74,90) ; v1(75,84.5) 79.027,84.5 79.427,84.9 80.173,84.9 80.472,84.6 81.362,84.6 81.762,85 82.838,85 83.238,84.6 88,84.6 v1(88.1,84.7) ; JP1-1.1@79.631,55.53 80.686,55.53 81.736,56.58 v1(83.68,56.58) ; v1(84.3,68.8) 86.2,68.8 v1(86.3,68.7)
  other v1: 71.8,90.2
PD10: C25.1 C26.1 C27.1 C28.1 C29.1 JP1-2.2 MCU.10 MCU.32 MCU.45 MCU.61 MCU.104 MCU.124 | length 152.3
  Top Layer w0.2: C26.1@52.209,44.388 53.188,44.388 54.2,45.4 54.2,49.113 53.7,49.613 53.7,52.498 53.571,52.627 53.571,53.373 54.3,54.102 v1(54.3,63.2) 53.7,63.8 53.7,71.818 C29.1@53.413,72.105 C27.1@53.413,77.947 ; v1@59.4,72.573 60.45,71.523 60.45,67.399 60.5,67.349 60.5,67 60.9,66.6 C25.1@61.95,66.6 ; v1@59.4,73.3 58.983,73.717 58.983,77.993 MCU.10@60.499,79.51 61.2,80.21 61.2,80.281 61.232,80.281 61.232,80.695 60.4,81.527 v1(60.4,82.4) ; MCU.124@64.389,92.379 65.868,90.9 v1(66.4,90.9) ; MCU.32@68.278,71.732 69.38,72.834 69.38,73.4 72.08,76.1 72.182,76.1 ; v1(72.2,79.9) 72.464,80.164 72.727,79.9 73.673,79.9 74.173,80.4 78.473,80.4 78.873,80 79.596,80 MCU.61@80.793,78.803 ; MCU.104@73.722,96.268 72.7,95.246 72.7,94.073 72.4,93.773 72.4,91.6 v1(72.5,91.5) 72.5,90.773 72.7,90.573 72.7,81.673 72,80.973 72,79.908 72.104,79.804 71.8,79.5 71.8,76.482 72.182,76.1 ; MCU.45@75.137,73.146 72.182,76.1
  Bottom Layer w0.2: v1(53.3,73.6) 54.2,72.7 v1@59.1,72.7 ; v1@53.9,63.2 54,63.3 79.6,63.3 JP1-2.2@79.7,63.2 ; v1(60.4,82.4) 60.827,82.4 60.827,82.1 60.7,81.973 60.7,81.227 61.227,80.7 63.375,80.7 64.4,81.725 64.4,81.973 65.227,82.8 66.127,82.8 66.527,82.4 67.461,82.4 67.761,82.1 71.038,82.1 71.8,81.338 v1@71.8,80.1 ; v1(66.4,90.9) 66.6,90.9 67,91.3 72.3,91.3 v1(72.5,91.5)
  other v1: 59.5,73
PN1: C41.1 JP1-3.1 MCU.34 | length 37.3
  Top Layer w0.2: JP1-3.1@49.95,78.04 51.9,76.09 51.9,73.833 51.963,73.77 51.963,71.19 52.4,70.753 v1(52.4,69.9) ; C41.1@61.8,69.6 C41.1@61.9,69.6 v1(61.9,71.1) ; MCU.34@68.985,71.025 70.16,72.2 70.5,72.2 70.778,71.922 70.778,69.978 69.882,69.082 69.964,69 v1@70.4,69.436 ; v1(70,69.282) v1@70.246,69.282
  Bottom Layer w0.2: v1(52.4,69.9) 57.927,69.9 58.727,70.7 58.827,70.6 59.573,70.6 60.073,71.1 v1(61.9,71.1) 68.062,71.1 70.062,69.1 70.044,69.082 70.126,69 70.4,69.274 70.392,69.282 v1(70,69.282)
PR6: MCU.51 R140.2 | length 20.7
  Top Layer w0.2: R140.2@73.5,58.1 73.5,61.7 74.225,62.425 74.29,62.425 75.7,63.835 75.7,68.033 77.967,70.3 78.034,70.3 78.611,70.877 78.611,71.311 79.5,72.2 79.5,72.825 79.6,72.925 MCU.51@77.258,75.267
PT1: MCU.37 R26.1 | length 12.4
  Top Layer w0.2: R26.1@68.505,60.814 68.591,60.9 69.5,60.9 69.8,61.2 69.8,62.901 69.7,63.001 69.7,64.5 72,66.8 72,67.996 73.195,69.191 73.195,69.431 MCU.37@72.308,70.317
PT2: MCU.38 R25.1 | length 8.6
  Top Layer w0.2: R25.1@70.75,63.75 70.75,64.984 72.4,66.634 72.4,67.831 73.7,69.131 73.7,69.633 MCU.38@72.662,70.671
PT3: C22.1 C43.1 MCU.41 R23.2 | length 62.5
  Top Layer w0.2: v1(71.8,69.4) 71.8,70.189 71.222,70.767 71.222,72.044 71,72.266 71,73.173 71.427,73.6 72.273,73.6 72.8,73.073 72.8,73.008 72.99,72.818 72.99,72.535 73.652,71.873 73.652,71.732 MCU.41@73.722,71.732 ; R23.2@77.081,38.18 C22.1@77.081,41.08 77.081,42.081 77.53,42.53 77.83,42.53 78.006,42.706 78.006,46.183 77.981,46.208 77.981,46.954 77.85,47.085 77.85,50.049 77.8,50.099 77.8,51.901 77.85,51.951 77.85,53.449 77.5,53.799 77.5,54.673 77.286,54.887 77.425,55.026 77.425,56.774 77.2,56.999 77.2,57.301 77.425,57.526 77.425,59.274 77.249,59.45 77.249,59.576 77.4,59.727 77.4,60.473 77.2,60.673 77.2,61.327 77.7,61.827 77.7,62.573 77.3,62.973 77.3,65.501 78.4,66.601 v1(78.4,67) ; C43.1@86.891,70.144 87.3,69.735 87.3,67.573 87.1,67.373 87.1,66.6 87.9,65.8 v1(87.9,65.3)
  Bottom Layer w0.2: v1(71.8,69.4) 76.7,69.4 78.1,68 78.1,67.3 v1(78.4,67) 79.7,65.7 87.6,65.7 v1@87.8,65.5
PT5: MCU.50 R7.2 | length 50.5
  Top Layer w0.2: R7.2@43.381,61.78 44.58,61.78 45.3,62.5 45.3,66.424 46.525,67.649 46.525,68.966 47.059,69.5 47.073,69.5 47.6,70.027 47.6,70.796 46.5,71.896 46.5,74.793 47,75.293 v1(47,76.4) ; v1(74.8,76.4) 75.418,76.4 MCU.50@76.904,74.914
  Bottom Layer w0.2: v1(47,76.4) 49.365,76.4 49.515,76.55 50.385,76.55 50.425,76.59 50.99,76.59 51.7,77.3 64.327,77.3 64.827,76.8 65.573,76.8 66.1,77.327 66.1,77.581 66.423,77.904 67.104,77.904 67.6,78.4 69.973,78.4 70.8,77.573 70.8,77.564 71.145,77.22 73.98,77.22 v1(74.8,76.4)
PT14: C49.1 JP1-6.1 MCU.73 | length 49.6
  Top Layer w0.2: MCU.73@84.683,85.308 85.741,86.367 85.741,87.441 86.2,87.9 87.8,87.9 88.5,88.6 C49.1@88.5,89.75 ; v1(94,88.7) 94,76.073 93.6,75.673 93.6,74.527 94,74.128 94,65.21 94.681,64.529 94.681,62.519 v1(94.9,62.3)
  Bottom Layer w0.2: v1(86.3,87.9) 87,88.6 93.9,88.6 v1(94,88.7) ; JP1-6.1@91.131,60.53 91.131,59.469 91.2,59.4 91.759,59.4 91.959,59.2 94,59.2 94.721,59.921 94.721,62.121 v1(94.9,62.3)
PU1: MCU.42 R26.2 | length 13.2
  Top Layer w0.2: R26.2@71.005,60.814 71.005,62.105 72,63.1 72,65.669 72.8,66.469 72.8,67.665 74.809,69.674 74.809,71.282 74.076,72.015 MCU.42@74.076,72.085
PU2: MCU.43 R25.2 | length 10.8
  Top Layer w0.2: R25.2@73.25,63.75 73.2,63.8 73.2,67.499 73.376,67.675 73.809,67.675 74.5,68.366 74.5,68.53 76,70.03 76,70.396 75.9,70.496 75.9,70.968 MCU.43@74.429,72.439
PU4: MCU.39
PU5: C40.1 MCU.48 Y2.1 | length 28.8
  Top Layer w0.2: MCU.48@76.197,74.207 77.6,72.804 v1(77.6,71.2) ; v1(90.602,70.356) 90.602,67.454 91,67.056 Y2.1@92.352,67.056 ; C40.1@95.8,67.1 v1@95.8,68.3
  Bottom Layer w0.2: v1(77.6,71.2) 79.762,71.2 80.862,70.1 89.638,70.1 90.248,70.71 v1(90.602,70.356) ; v1(90.6,68.2) 95.5,68.2 v1(95.8,68.5)
PU6: C42.1 MCU.49 Y2.2 | length 24.2
  Top Layer w0.2: MCU.49@76.551,74.56 78.5,72.611 v1(78.5,72.6) ; Y2.2@92.352,69.556 92.4,69.604 v1(92.4,71.2) ; C42.1@95.731,69.972 v1(95.731,71.269)
  Bottom Layer w0.2: v1(78.5,72.6) 78.927,72.6 81.027,70.5 89.473,70.5 90.229,71.256 92.344,71.256 v1(92.4,71.2) 95.662,71.2 v1(95.731,71.269)
PU7: C15.1 C18.1 JP1-2.1 L3.1 MCU.56 | length 21.7
  Top Layer w0.2: MCU.56@79.026,77.035 80,76.061 80,74.505 80.805,73.7 80.938,73.7 81.825,72.813 81.825,70.876 82.1,70.601 82.1,69.25 C18.1@82.75,69.25 C15.1@82.75,66.25 82.75,65.15 82.25,64.65 JP1-2.1@82.25,63.2 ; v1(79.9,64.8) 79.9,65.75 80.3,66.15 L3.1@80,66.45
  Bottom Layer w0.2: v1@79.8,64.8 81.7,64.8 82.24,64.26 JP1-2.1@82.24,63.2
PU8: C14.1 JP1-5.2 MCU.57 | length 36.4
  Top Layer w0.2: MCU.57@79.379,77.389 80.4,76.368 80.4,75.127 80.927,74.6 82.9,74.6 85.2,72.3 85.2,68.1 86.7,66.6 86.7,66.434 87,66.134 87,64.927 88,63.927 88,60.879 86.871,59.75 86.871,54.329 v1(86.9,54.3) ; JP1-5.2@91.091,55.53 91.381,55.24 C14.1@91.381,52.28
  Bottom Layer w0.2: v1(86.9,54.3) 87.266,54.3 87.466,54.5 87.486,54.48 90.041,54.48 JP1-5.2@91.091,55.53
PU14: C49.2 MCU.74 R29.2 | length 21.3
  Top Layer w0.2: MCU.74@84.329,85.662 85.3,86.633 85.3,88.2 86,88.9 C49.2@86,89.75 ; C49.2@85.95,89.8 86.9,89.8 87.2,90.1 v1@87.2,91 ; R29.2@99.4,89 R29.2@99.4,89.4 v1(99.4,90.8) v1@99.4,91
  Bottom Layer w0.2: v1(87.3,91.2) 99,91.2 v1(99.4,90.8)
PU15: C47.1 JP7.2 MCU.75 | length 58.5
  Top Layer w0.2: C47.1@61.331,98.655 61.376,98.7 62.1,98.7 63.7,100.3 63.7,102.773 64.3,103.373 64.3,104.727 63.7,105.327 63.7,106.82 v1@63.3,107.22 ; MCU.75@83.975,86.015 83.975,86.086 84.9,87.011 84.9,98 v1(85.5,98.6)
  Bottom Layer w0.2: JP7.2@52.821,109.08 53.951,107.95 62.65,107.95 v1(63.6,107) ; v1(62.9,99.6) 63.727,99.6 64.627,98.7 65.373,98.7 85.4,98.7 v1(85.5,98.6)
"PWR CN": MN3.1 Q1.3 R5.2 | length 29.8
  Top Layer w1.25: MN3.1@29.752,65.03 v1(29.752,67.651) ; R5.2@36.131,80.53 v1(36.131,81.869) ; v1(39.9,74.6) 40.125,74.825 v1@40.125,80.5
  Bottom Layer w1.25: v1(29.752,67.651) 35.87,67.651 37.124,68.905 38.097,68.905 38.103,68.911 38.112,68.911 39.701,70.5 39.9,70.5 v1(39.9,74.6) ; v1(36.131,81.869) 39.056,81.869 v1@40.1,80.825
  other v1: 40.1,80.8
RTS0: MN16.8 R122.2 RR7-2.2 | length 21.7
  Top Layer w0.2: R122.2@88.478,95.776 88.478,99.729 89.949,101.2 90,101.2 v1(90,103.1) ; RR7-2.2@96.65,101.5 96.65,105.45 97.105,105.905 MN16.8@99.235,105.905
  Bottom Layer w0.2: v1(90,103.1) 93.927,103.1 94.427,102.6 95.173,102.6 95.673,103.1 v1(96.6,103.1)
RXD0: MN16.10 R121.2 R202.1 | length 15.5
  Top Layer w0.2: MN16.10@99.235,104.605 100.195,104.605 100.8,104 100.8,102.6 98.4,100.2 98.4,96 99.07,95.33 R121.2@99.932,95.33 R202.1@99.932,92.409
TXD0: MN16.7 R120.2 RR7-3.2 | length 17.4
  Top Layer w0.2: R120.2@85.9,107.8 85.95,107.75 v1(87.75,107.75) RR7-3.2@89.25,107.75 ; v1@95.645,106.555 MN16.7@99.235,106.555
  Bottom Layer w0.2: v1(87.75,107.75) 87.75,105.827 88.277,105.3 91.655,105.3 92.365,106.01 93.361,106.01 93.751,106.4 v1(95.6,106.4)
pads on no net: D6.3 J1. J1.2 J13.1 J13.4 J13.6 J13.9 J14.18 J14.22 J14.24 J14.30 J14.35 J14.36 J15.23 J15.29 J15.30 J15.31 J15.32 J15.33 J15.35 J18.5 J18.12 J18.13 J18.25 J18.30 J18.32 J18.34 J18.36 J19.27 MN14.7 MN14.8 MN14.9 MN16.12 Y1.5

## Polygon pours and split planes (outlines as drawn)
+3V3 on +3V3 (split plane): 177.29,25.91 25.91,25.91 25.91,126.49 177.29,126.49
GND on GND (split plane): 177.29,25.91 25.91,25.91 25.91,126.49 177.29,126.49

## Silkscreen, mask and mechanical layers (free items; w line width, h text height)
Top Overlay:
  lines w0.2: 25.781,27.75 122.131,27.75 122.131,123.03 25.781,123.03 25.781,27.75

## Text inside footprints (layer, text, board x,y; h text height)
J2: Top Overlay "20" at 28.258,55.724 h1.27 r90; Top Overlay "19" at 30.798,55.724 h1.27 r90; Top Overlay "1" at 30.798,28.8 h1.27 r90; Top Overlay "2" at 28.258,28.8 h1.27 r90
J13: Top Overlay "6" at 117.105,112.29 h1 r270; Top Overlay "9" at 117.105,103.98 h1 r270; Top Overlay "5" at 107.705,102.595 h1 r270; Top Overlay "1" at 107.705,113.425 h1 r270
J14: Top Overlay "1" at 116.742,84.8 h1.27 r270; Top Overlay "2" at 119.282,84.8 h1.27 r270; Top Overlay "40" at 119.282,31.968 h1.27 r270; Top Overlay "39" at 116.742,31.968 h1.27 r270
J15: Top Overlay "39" at 38.968,116.148 h1.27 r180; Top Overlay "40" at 38.968,113.608 h1.27 r180; Top Overlay "2" at 91.8,113.608 h1.27 r180; Top Overlay "1" at 91.8,116.148 h1.27 r180
J18: Top Overlay "39" at 91.272,118.692 h1.27; Top Overlay "40" at 91.272,121.232 h1.27; Top Overlay "2" at 38.44,121.232 h1.27; Top Overlay "1" at 38.44,118.692 h1.27
J19: Top Overlay "39" at 90.573,29.472 h1.27; Top Overlay "40" at 90.573,32.012 h1.27; Top Overlay "2" at 37.741,32.012 h1.27; Top Overlay "1" at 37.741,29.472 h1.27